# Altium PCB Sensor-PCB.PcbDoc
Units mm, origin at the board's own origin, x right, y up, seen from the top; angles counter-clockwise.
Board outline 100.25 x 60.25 mm, 2 copper layers (Top Layer, Bottom Layer); 59 components, 34 nets, 161 pads, 323 vias.
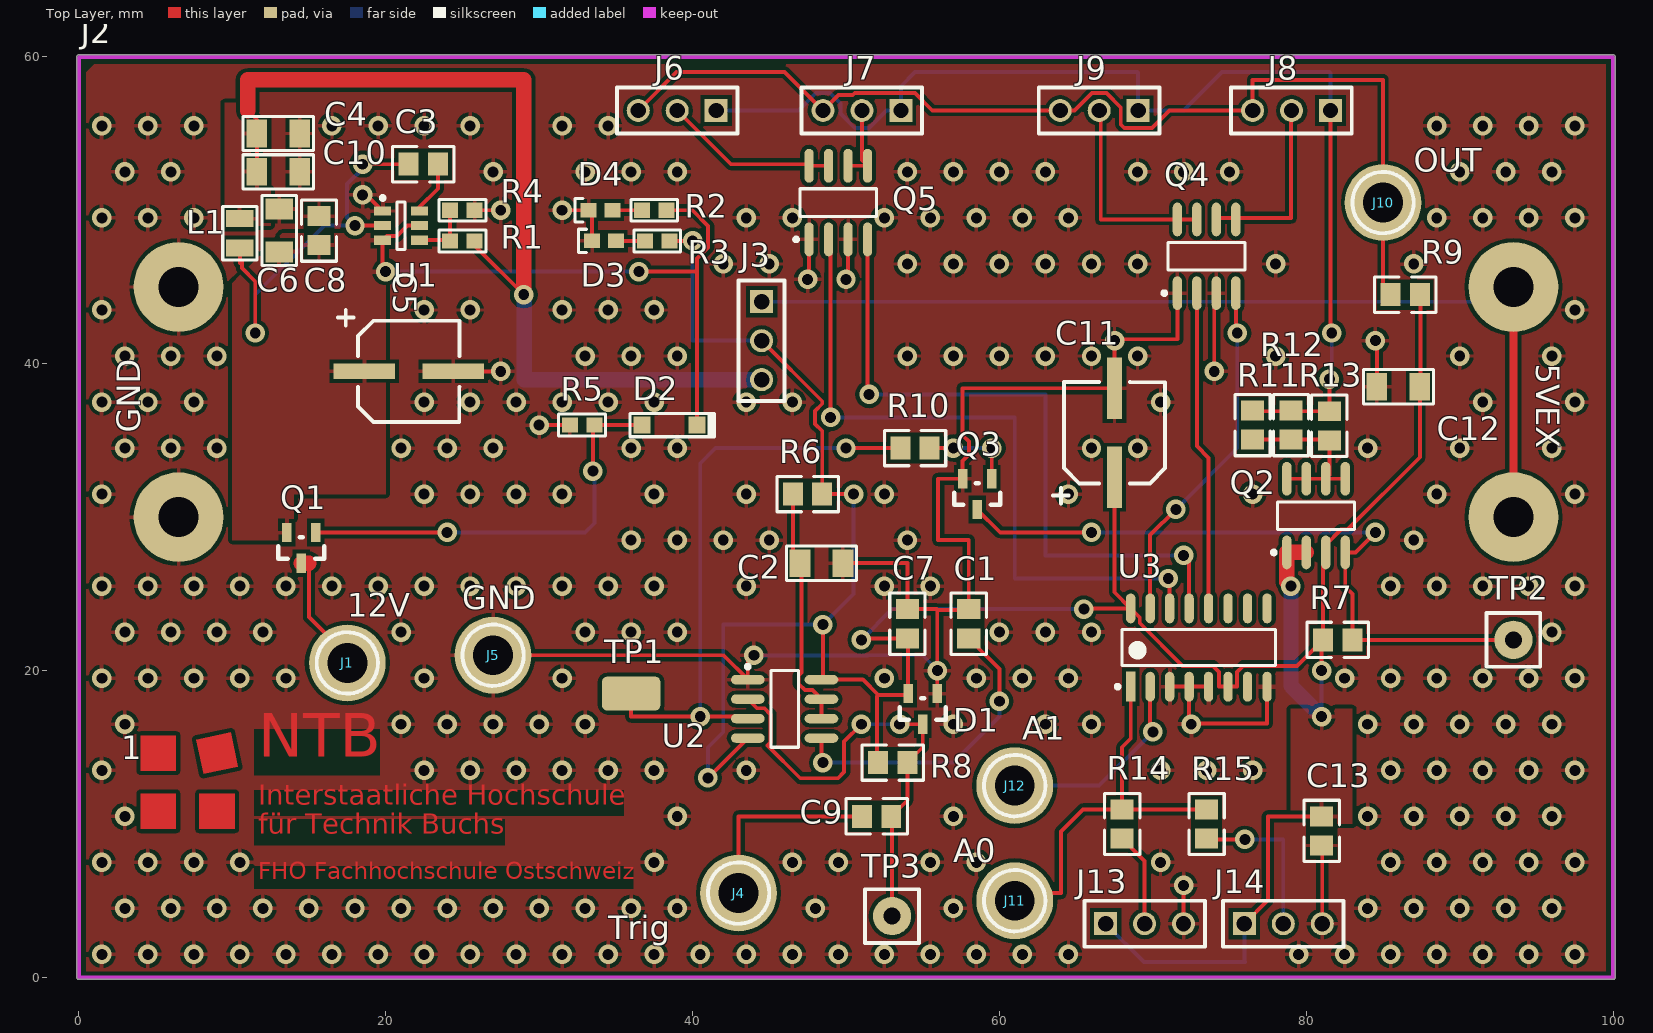
[diagram p0: Top Layer view]
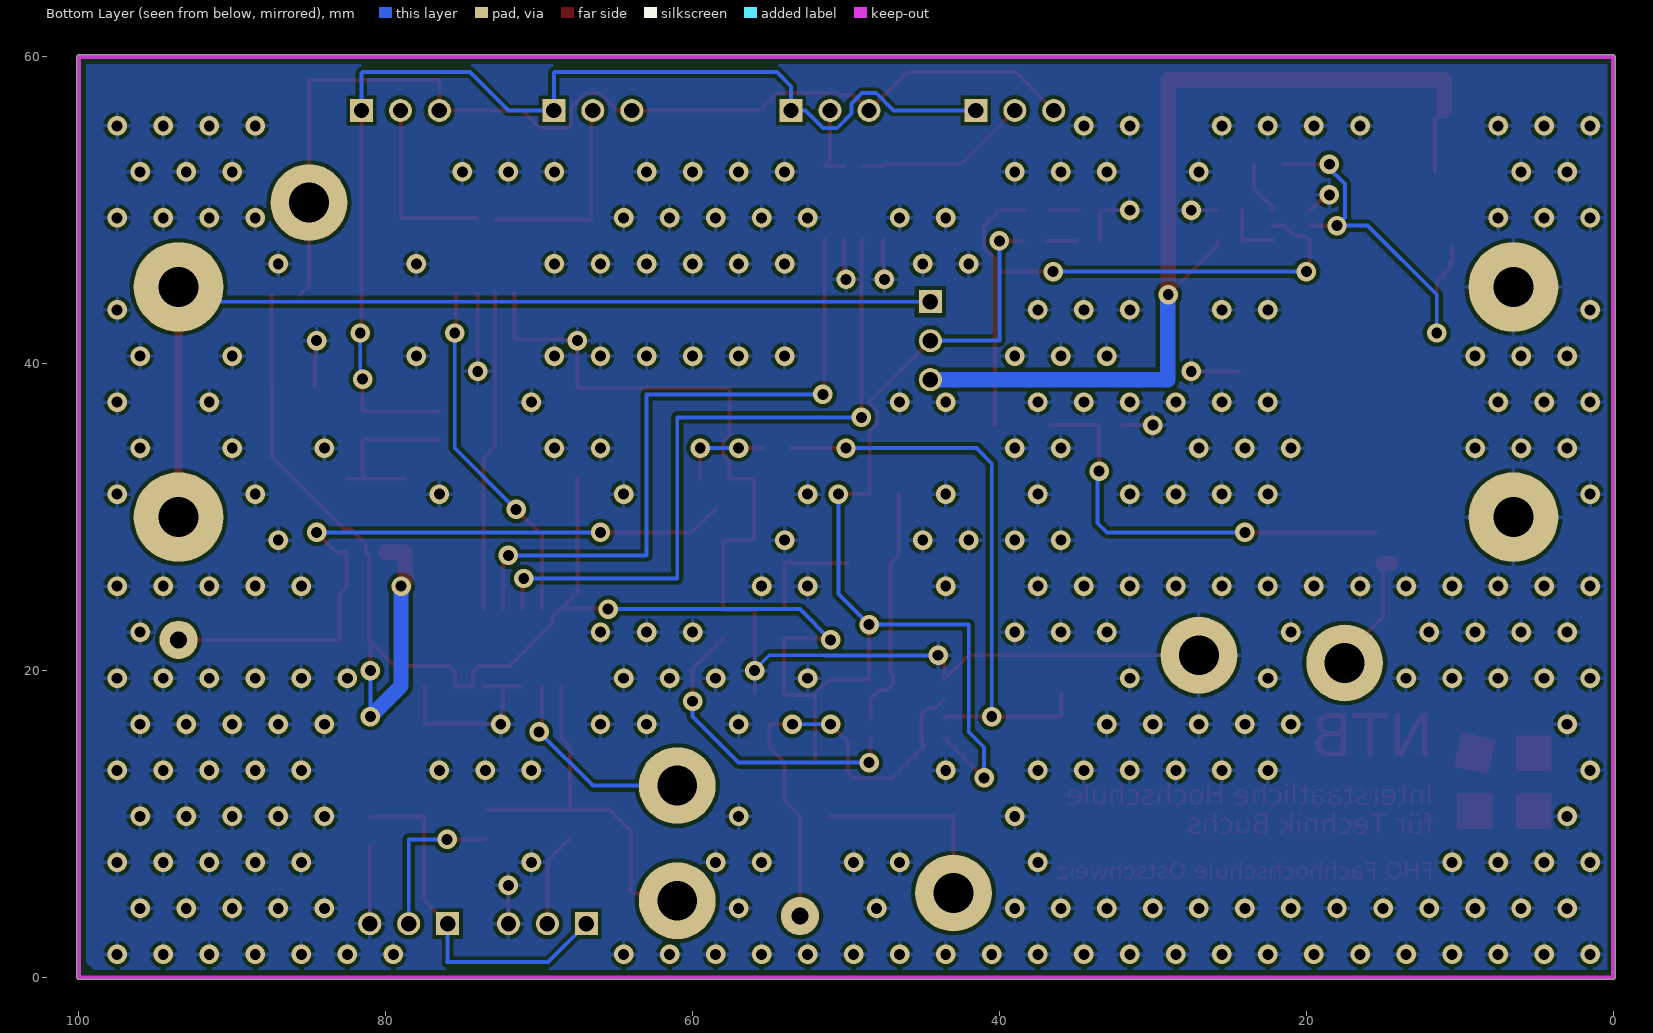
[diagram p1: Bottom Layer view, seen from below]
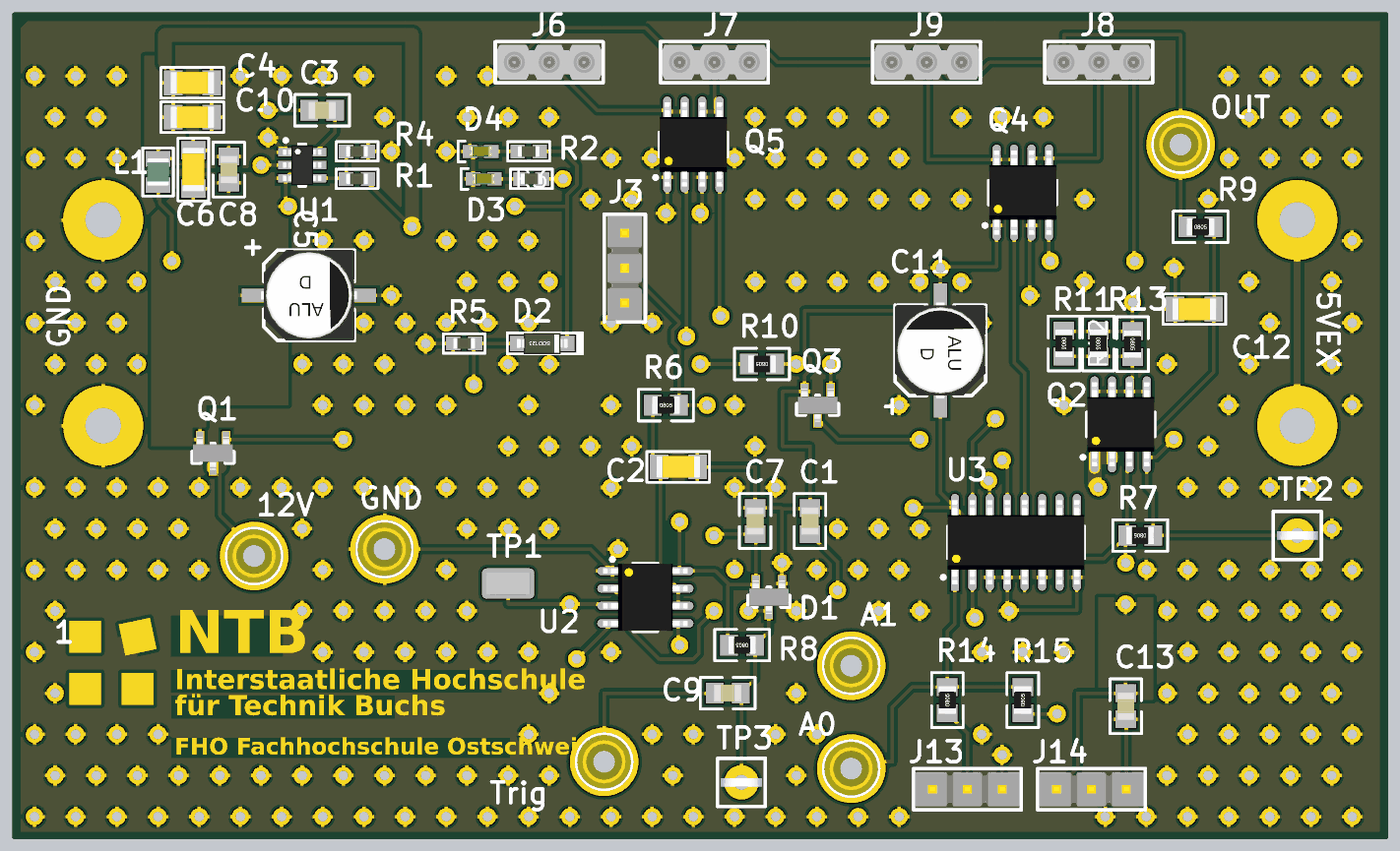
[diagram p2: 3D render of the assembled board from above, using the file's embedded part models]

## Layer stack, top to bottom
Top Solder: solder mask 0.0102, Solder Resist, Dk 3.5
Top Layer: signal copper 0.0356
Dielectric 1: dielectric 0.32, FR-4, Dk 4.8
Bottom Layer: signal copper 0.0356
Bottom Solder: solder mask 0.0102, Solder Resist, Dk 3.5

## Board outline
0,-0.127 cw(c0,0) -0.127,0 -0.127,60 cw(c0,60) 0,60.127 100,60.127 cw(c100,60) 100.127,60 100.127,0 cw(c100,0) 100,-0.127

## Design rules (kind name [scope] priority, off if disabled: settings)
Clearance [All] p1: gap=0.254 ignorepadtopadclearanceinfootprint=FALSE except(0: Arc-Hole Track-Hole SMDPad-Hole THPad-Hole Via-Hole Fill-Hole Poly-Hole Region-Hole Text-Hole)
ComponentClearance "Schematic Component Clearance Constraint" [InComponent('J2')] p1: gap=0 collisioncheckmode=3 verticalgap=0 showdistances=FALSE
ComponentClearance [All] p2: gap=0.254 collisioncheckmode=3 verticalgap=0.254 showdistances=FALSE
HoleSize [All] p1: absolutevalues=TRUE maxlimit=5 minlimit=0.4 maxpercent=80.000 minpercent=20.000
PolygonConnect [All] p1: connectstyle=Relief reliefconductorwidth=0.254 reliefentries=4 polygonreliefangle="90 Angle" airgapwidth=0.254
RoutingVias [All] p1: holewidth=0.711 width=1.27 viastyle="Through Hole" minholewidth=0.711 minwidth=1.27 maxholewidth=0.711 maxwidth=1.27
SilkToSilkClearance [All] p1: silktosilkclearance=0
SolderMaskExpansion [All] p1: expansion=0.102
Width [All] p1: maxlimit=1 minlimit=0.254 preferedwidth=0.254
27 further rules are at their usual default settings.

## Components (designator, comment, footprint, x,y, rotation, side; value= is the part's Value field where it differs from the comment)
1 "NTB Logo Medium" "NTB Logo Medium Copper" 4,6 r0 top
C1 "100nF" CAP-0805[2012] 58,23.05 r90 top
C2 "10uF" CAP-1206[3216] 48.4,27 r0 top
C3 "100nF" CAP-0805[2012] 22.45,53 r180 top
C4 "22uF" CAP-1206[3216] 13,55 r0 top
C5 "AVE476M16D16T-F" "CDE_CAP AVE CODE D_H" 21.5,39.5 r270 top value=47uF
C6 "10uF" CAP-1206[3216] 13.067,48.683 r90 top
C7 "100nF" CAP-0805[2012] 54,23.05 r90 top
C8 "100nF" CAP-0805[2012] 15.654,48.677 r90 top
C9 "1nF" CAP-0805[2012] 52,10.5 r0 top
C10 "22uF" CAP-1206[3216] 13,52.5 r0 top
C11 "AVE476M16D16T-F" "CDE_CAP AVE CODE D_H" 67.5,35.5 r0 top value=47uF
C12 "10uF" CAP-1206[3216] 86,38.5 r180 top
C13 "100nF" CAP-0805[2012] 81,9.55 r270 top
D1 "BAT721S" SOT-23 55,17.5 r0 top
D2 "BZT52C4V7" SOD-123 38.5,36 r180 top
D3 "LTST-C190GKT" "LED 0603 green" 34.225,48 r0 top
D4 "LTST-C190GKT" "LED 0603 green" 34,50 r0 top
J1 "12V" "Laborbuchse 2mm" 17.5,20.5 r0 top
J2 "ExpBoardSmall" EXPBOARDCON 93.5,30 r180 top locked
J3 "3 Pin Header" "3PIN HEADER 2.54MM" 44.5,44.02 r90 top
J4 "Trig" "Laborbuchse 2mm" 43,5.5 r0 top
J5 "GND" "Laborbuchse 2mm" 27,21 r0 top
J6 "3 Pin Header Buchse" "3PIN HEADER SOCKET 2.54MM" 41.52,56.5 r0 top
J7 "3 Pin Header Buchse" "3PIN HEADER SOCKET 2.54MM" 53.56,56.5 r0 top
J8 "3 Pin Header Buchse" "3PIN HEADER SOCKET 2.54MM" 81.56,56.5 r0 top
J9 "3 Pin Header Buchse" "3PIN HEADER SOCKET 2.54MM" 69.02,56.5 r0 top
J10 "OUT" "Laborbuchse 2mm" 85,50.5 r0 top
J11 "A0" "Laborbuchse 2mm" 61,5 r0 top
J12 "A1" "Laborbuchse 2mm" 61,12.5 r0 top
J13 "3 Pin Header" "3PIN HEADER 2.54MM" 66.94,3.5 r180 top
J14 "3 Pin Header" "3PIN HEADER 2.54MM" 75.98,3.5 r180 top
L1 "CKP2016 4R7M-T" IND-0806 10.5,48.5 r90 top
Q1 "STR1P2UH7" SOT-23 14.5,28 r0 top
Q2 "IRF7204PBF" SOIC-8 80.635,30.1 r90 top
Q3 "BC846B-7-F" SOT-23 58.55,31.5 r0 top
Q4 "IRF7311PBF" SOIC-8 73.5,47 r90 top
Q5 "IRF7311PBF" SOIC-8 49.5,50.5 r90 top
R1 "56k" RES-0603[1608] 25,48 r0 top value=10K
R2 "TBD" RES-0603[1608] 37.5,50 r0 top value=10K
R3 "TBD" RES-0603[1608] 37.7,48 r0 top value=10K
R4 "10k" RES-0603[1608] 25,50 r180 top value=10K
R5 "10K" RES-0603[1608] 32.8,36 r0 top
R6 "16k" RES-0805[2012] 47.5,31.5 r0 top
R7 "1k" RES-0805[2012] 82.05,22 r180 top value=16k
R8 "4k3" RES-0805[2012] 53.05,14 r180 top
R9 "510R" RES-0805[2012] 86.45,44.5 r0 top value=16k
R10 "10k" RES-0805[2012] 54.5,34.5 r180 top value=16k
R11 "33R" RES-0805[2012] 76.5,36 r270 top value=16k
R12 "33R" RES-0805[2012] 79,36 r270 top value=16k
R13 "33R" RES-0805[2012] 81.5,35.95 r270 top value=16k
R14 "10k" RES-0805[2012] 68,10 r90 top value=16k
R15 "10k" RES-0805[2012] 73.5,10 r90 top value=16k
TP1 "Testpoint SMD 1206" TP-SMD-1206 36,18.5 r0 top
TP2 "Testpunkt THT 1mm" TP-THT-1.1mm 93.5,22 r0 top
TP3 "Testpunkt THT 1mm" TP-THT-1.1mm 53,4 r0 top
U1 "TPS562209" SOT-23-6 21,49 r0 top
U2 "ICM7555" SOIC-8 46,17.5 r0 top
U3 "74HC237D,653" SOIC-16 73,21.5 r90 top

## Footprints (in the part's own frame and the unit in brackets; to place one, negate y for a bottom-side part, rotate by r counter-clockwise, add the part's x,y. Pads: shape width x height; smd on the part's side, far side on the other; paste and mask are expansions set on the pad)
"3PIN HEADER 2.54MM" [mm]
  rect 1.5x1.5 hole 1 paste-0.002 mask+0.07: 1(0.02,0)
  round 1.5 hole 1 paste-0.002 mask+0.07: 2(-2.52,0) 3(-5.06,0)
  silkscreen extent -6.46,-1.5 1.4,1.5, body extent -6.33,-1.24 1.29,1.24, height 8.38
"3PIN HEADER SOCKET 2.54MM" [mm]
  rect 1.5x1.5 hole 1 paste-0.002 mask+0.07: 1(0.02,0)
  round 1.5 hole 1 paste-0.002 mask+0.07: 2(-2.52,0) 3(-5.06,0)
  silkscreen extent -6.46,-1.5 1.4,1.5, body extent -6.33,-1.27 1.29,1.27, height 3.8
CAP-0805[2012] [mm]
  rect 1.3x1.5 smd: 1(-0.95,0) 2(0.95,0)
  silkscreen extent -2,-1.15 2,1.15, body extent -1,-0.62 1,0.63, height 0.6
CAP-1206[3216] [mm]
  rect 1.35x1.8 smd: 1(-1.4,0) 2(1.4,0)
  silkscreen extent -2.29,-1.12 2.29,1.12, body extent -1.6,-0.8 1.6,0.8, height 1.8
"CDE_CAP AVE CODE D_H" [mm]
  rect 1x4 smd paste-0.002 mask+0.07: 1(0,-2.9) 2(0,2.9)
  silkscreen extent -4,-4.6 3.29,3.3, body extent -3.31,-3.5 3.29,3.5
EXPBOARDCON [mm]
  round 5.842 hole 2.6: 1(0,0) 2(0,-15) 3(87,-15) 4(87,0)
  Keep-Out Layer lines w0.254: 93.5,30 -6.5,30 -6.5,-30 93.5,-30 93.5,30
IND-0806 [mm]
  rect 1.13x1.8 smd: 1(-0.965,0) 2(0.965,0)
  silkscreen extent -1.75,-1.12 1.75,1.12, body extent -1,-0.8 1,0.8, height 1
"Laborbuchse 2mm" [mm]
  round 5 hole 2.6: 1(0,0)
  silkscreen extent -2,-2 2,2, body extent -2.01,-2.01 2,2.01, height 0.5
"LED 0603 green" [mm]
  rect 1.05x0.95 smd: 1(-0.775,0) 2(0.775,0)
  silkscreen extent -1.65,-0.76 -1.14,0.76, body extent -0.81,-0.4 0.81,0.4, height 0.6
"NTB Logo Medium Copper" [mm]
  Top Layer region: 0.023,7.458 2.348,7.458 2.348,9.783 0.023,9.783
  Top Layer region: 0.023,3.658 2.348,3.658 2.348,5.983 0.023,5.983
  Top Layer region: 3.848,3.658 6.173,3.658 6.173,5.983 3.848,5.983
  Top Layer region: 4.115,7.242 6.389,7.725 5.905,9.999 3.632,9.516
RES-0603[1608] [mm]
  rect 1.05x1 smd: 1(-0.8,0) 2(0.8,0)
  silkscreen extent -1.52,-0.71 1.52,0.71, body extent -0.8,-0.4 0.8,0.4, height 0.5
RES-0805[2012] [mm]
  rect 1.3x1.5 smd: 1(-0.95,0) 2(0.95,0)
  silkscreen extent -2,-1.15 2,1.15, body extent -1,-0.62 1,0.63, height 0.6
SOD-123 [mm] "SOD-123, 2 leads, plastic surface-mounted package"
  rect 1.1x1.1 smd: 1(-1.8,0) 2(1.8,0)
  silkscreen extent -2.92,-0.76 2.57,0.76, body extent -1.85,-0.77 1.85,0.78, height 1.35
SOIC-8 [mm]
  oval 2.2x0.6 smd: 1(-2.4,1.905) 2(-2.4,0.635) 3(-2.4,-0.635) 4(-2.4,-1.905) 5(2.4,-1.905) 6(2.4,-0.635) 7(2.4,0.635) 8(2.4,1.905)
  silkscreen extent -2.52,-2.5 0.9,2.88, body extent -3.07,-2.44 3.07,2.45, height 1.76
SOIC-16 [mm]
  rect 1.95x0.6 smd: 1(-2.55,4.445)
  oval 1.95x0.6 smd: 2(-2.55,3.175) 3(-2.55,1.905) 4(-2.55,0.635) 5(-2.55,-0.635) 6(-2.55,-1.905) 7(-2.55,-3.175) 8(-2.55,-4.445) 9(2.55,-4.445) 10(2.55,-3.175) 11(2.55,-1.905) 12(2.55,-0.635) 13(2.55,0.635) 14(2.55,1.905) 15(2.55,3.175) 16(2.55,4.445)
  silkscreen extent -2.67,-5 1.18,5.42, body extent -3.07,-4.98 3.07,4.98, height 1.73
SOT-23 [mm]
  rect 0.61x1.26 smd paste-0.05: 1(0.95,1) 2(-0.95,1) 3(0,-1)
  silkscreen extent -1.5,-0.7 1.5,0.7, body extent -1.45,-1.21 1.45,1.21, height 0.98
SOT-23-6 [mm]
  rect 1.1x0.6 smd: 1(-1.2,0.95) 2(-1.2,0) 3(-1.2,-0.95) 4(1.2,-0.95) 5(1.2,0) 6(1.2,0.95)
  silkscreen extent -1.32,-1.55 0.25,1.92, body extent -1.4,-1.45 1.4,1.45, height 1.45
TP-SMD-1206 [mm]
  rrect30% 3.8x2.2 smd: 1(0,0)
  body extent -1.6,-0.81 1.6,0.81, height 2.22
TP-THT-1.1mm [mm]
  round 2.5 hole 1.1: 1(0,0)
  silkscreen extent -1.75,-1.75 1.75,1.75, body extent -1.5,-0.32 1.5,0.32, height 8.3

## Part data
1: library part "NTB Logo Medium Copper"
C1 C3 C7 C8 C13: library part "MLCC 0805 100n 50V", "100n 50V X7R MLCC 0805 (1608 Metric)", Case-EIA=0803, Case-Metric=2013, Rated Voltage=50V, Temperature Characteristics EIA=X7R, Temperature Range EIA=-55C/+125C, Tolerance=10%, ValAddon="50V, 10%"
C2 C6 C12: library part "MLCC 1206 10u 16V", "10u 16V X7R MLCC 1206 (3016 Metric)", Case-EIA=1206, Case-Metric=3216, Rated Voltage=10V, Temperature Characteristics EIA=X7R, Temperature Range EIA=-55C/+125C, Tolerance=10%, ValAddon="16V, 10%"
C4 C10: library part "MLCC 1206 22u 10V", "22u 10V X7R MLCC 1206 (3016 Metric)", Case-EIA=1206, Case-Metric=3216, Rated Voltage=10V, Temperature Characteristics EIA=X7R, Temperature Range EIA=-55C/+125C, Tolerance=10%, ValAddon="10V, 10%"
C5 C11: library part "ELKO 47uF 16V", "ELKO, 47uF, 16V, CDE_AVE476M16D16T-F_AVE CODE D", Distributor PartNr=598-AVE476M16D16T-F, Manufacturer="Cornell Dubilier", ValueAddon="16V ±20 %", #Class=PASSIVE, #ClassSub=CAPACITOR, ComponentLink1Description="Manufacturer Link", ComponentLink2Description=Datasheet, ComponentLink2URL=http://www.cde.com/catalogs/AVE.pdf, ComponentLink3Description="Packaging Specification", Distributor=Mouser, Manufacturer PartNr=AVE476M16D16T-F, Published=20121220, Publisher="Stefan Ursella, M.Eng", RefFootprint="CDE_CAP AVE CODE D", RefSchema="CDE_AVE476M16D16T-F_AVE CODE D"
C9: library part "MLCC 0805 1n 16V", "MLCC - SMD/SMT 0805 1000pF 16V C0G 10%", Manufacturer=Vishay, Manufacturer PartNr=VJ0805A102KXJPW1BC, Supplier Part Number 1=77-VJ0805A102KXJPBC, ValueAddon="16V, 10%", ComponentLink1Description="Manufacturer Link", ComponentLink1URL=http://www.vishay.com/product?docid=28548, ComponentLink2Description=Datasheet, ComponentLink2URL=http://www.vishay.com/docs/28548/vjw1bcbascomseries.pdf, Published=18.12.14, Publisher=SCLM, RefFootprint=Gen_0805_H, RefSchema=Cap_1nF, Status=Lager?, Supplier 1=Mouser
D1: library part BAT721S-SOT23, "NXP  BAT721S  SCHOTTKY-DIODE, 2FACH", Distributor PartNr=1081200, Manufacturer=NXP, ComponentLink1Description="Manufacturer Link", ComponentLink1URL=http://www.nxp.com/search?q=%09bat721s&type=keyword&rows=10, ComponentLink2Description=Datasheet, ComponentLink2URL=http://www.farnell.com/datasheets/453891.pdf, ComponentLink3Description="Packaging Specification", Distributor=Farnell, Manufacturer PartNr=BAT721S, Published=20150612, Publisher=SCNP, RefFootprint="CDE_CAP AVE CODE D", RefSchema="CDE_AVE476M16D16T-F_AVE CODE D"
D2: "4.7V Zener-Diode, BZT52C4V7", Forward Current="1.5 A", Forward Voltage=1.25V, Reverse Voltage=600V, ComponentLink1Description="Datasheet RF2L6S", ComponentLink1URL=V:\Diodes\RHOM_RF2L6S.pdf
D3 D4: library part "LED Green", "LED SMD 0603 green 6mcd", Color=green, Forward Current=30mA, Forward Voltage=2.1V, ComponentLink1Description="Datasheet LTST-C190GKT", ComponentLink1URL=V:\Diodes\Lite-On-LTST-C190GKT.pdf, Spectrum=565nm
J1 J4 J5 J10 J11 J12: library part Laborbuchse, "Laborbuchse", #Class=Connector, #ClassSub=Laborbuchse, Published=2008-12-16, Publisher="B.Sc. Ursella", RefFootprint="Laborbuchse 2mm", RefSchema=Laborbuchse, Size=2mm, Status=nLager
J3 J13 J14: "3 Pin Header 2.54mm", ComponentLink1Description="Manufacturer Link", ComponentLink2Description=Datasheet, Published=16.12.2014, Publisher=SCLM, RefFootprint=GEN_Buchsenleiste-2.54MM_3, RefSchema=Gen_Buchsenleiste_3-Pin, Status=Lager?
J6 J7 J8 J9: "3 Pin Header 2.54mm Buchse", ComponentLink1Description="Manufacturer Link"
L1: library part "L 4.7u", "MULTILAYER CHIP POWER INDUCTORS", Current Rating=900mA, Inductance=4u7, Manufactor="Taiyo Yuden", ComponentLink1Description="Datasheet Taiyo Yuden CK Series", ComponentLink1URL=V:\Inductor\Taiyo_Yuden_CK_Series.pdf, DCR=160mOhm
Q1: "Low Power P-Kanal Mosfet", Manufacturer="ST Microelectronics", ComponentLink1Description="Manufacturer Link", ComponentLink2Description=Datasheet, Rdson=100mOhm, Vde=30
Q2: library part IRF7204, "High Power P-Kanal Mosfet", Manufacturer="International Rectifiers", Supplier Part Number 1=9103350, ComponentLink1Description="Manufacturer Link", ComponentLink1URL=http://www.irf.com/, ComponentLink2Description=Datasheet, ComponentLink2URL=http://www.irf.com/product-info/datasheets/data/irf7204.pdf, Manufacturer PartNr=IRF7204PBF, Published=8-Jun-2000, Publisher="Altium Limited", RefFootprint=IRF_SO8_H, RefSchema=IRF_IRF7204_SO-8, Status=nLager, Supplier 1=Farnell
Q3: library part BC846B-SOT23, "NPN General-purpose Transistor", Distributor PartNr=1773617, Manufacturer="DIODES INC", #Class=SEMICONDUCTOR-TRANSISTOR, #ClassSub=BJT-NPN, ComponentLink1Description="Manufacturer Link", ComponentLink1URL=http://www.diodes.com/products/catalog/detail.php?item-id=6689&popup=datasheet, ComponentLink2Description=Datasheet, ComponentLink2URL=http://www.diodes.com/datasheets/ds11108.pdf, ComponentLink3Description="Packaging Specification", ComponentLink3URL=http://www.diodes.com/datasheets/ap02001.pdf, Distributor=Farnell, Manufacturer PartNr=BC846B-7-F, Published=17-Sep-2003, Publisher="Altium Limited", RefFootprint=DIODS_SOT23_1B2E3C_3_H, RefSchema=DIODS_BC846B-7-F_SOT23, Status=nLager
Q4 Q5: library part IRF7311, "Dual N-Kanal Mosfet", Manufacturer="International Rectifier", Supplier Part Number 1=1013364, ComponentLink1Description="Manufacturer Link", ComponentLink1URL=http://www.irf.com/, ComponentLink2Description=Datasheet, ComponentLink2URL=http://www.irf.com/product-info/datasheets/data/irf7311.pdf, Manufacturer PartNr=IRF7311PBF, Published=8-Jun-2000, Publisher="Altium Limited", RefFootprint=IRF_SO8_H, RefSchema=IRF_IRF7311_SO-8, Status=nLager, Supplier 1=Farnell
R1 R2 R3 R4 R5: library part "RES 0603", "0603 (1608 Metric) 1/10 W 10K 1 Thick Film Chip Resistor", Case-EIA=0603, Case-Metric=1608, Power="1/10 W", Temp. Coefficent=±100ppm, Tolerance=1%, Technology=SMT
R6 R7 R8 R9 R10 R11 R12 R13 R14 R15: library part "RES 0805", "0805 (2013 Metric) 1/10 W 10K 1 Thick Film Chip Resistor", Case-EIA=0805, Case-Metric=2013, Power="1/10 W", Temp. Coefficent=±100ppm, Tolerance=1%, Technology=SMT
TP1: "Testpoint xSmall", Type="Standard (No BOM)"
TP2 TP3: Manufacturer="Keystone Electronics", Supplier Part Number 1=534-1035, #Class=Connector, #ClassSub=Laborbuchse, FootprintRef=GEN_TP-THT-1.1mm_1_H, Published=2008-12-16, Publisher="B.Sc. Ursella", RefFootprint=GEN_TP-THT-1.1mm_1_H, RefSchema="Testpunkt 1mm", Status=nLager, Supplier 1=Mouser
U1: library part TPS562209-SOT23-6, "3-A Synchronous Step-Down Voltage Regulator", Manufactor="Texas Instruments", ComponentLink1Description="Datasheet TPS56x209", ComponentLink1URL=V:\Power_Management_ICs\PWM_Cont\TPS56x209.pdf, Order Nr.=TPS562209DDCR
U2: library part ICM7555-SOIC8, "General purpose CMOS timer", Manufacturer="National Semiconductor", Supplier Part Number 1=771-ICM7555, #Class=Analog, #SubClass="Timer Circuit", ComponentLink1Description=Datasheet, ComponentLink1URL=http://www.datasheetcatalog.org/datasheet/intersil/fn2867.pdf, ComponentLink2Description=Distributor, ComponentLink2URL=https://www.distrelec.ch/ishopWebFront/catalog/product.do/para/node/is/acaaabaaacaf/and/highlightNode/is/640145/and/id/is/01/and/series/is/1.html, Manufacturer PartNr=ICM7555, Published=15/04/2002, Publisher="Altium Hobart Technology Centre", RefFootprint=NXP_SO8(SOT96-1)_H, RefSchema=NXP_ICM7555_SO-8, Status=nLager, Supplier 1="Mouser Electronics"
U3: library part 74HC237D-SOIC16, "3-to-8 line decoder, demultiplexer, NXP, SO16", Manufacturer=NXP, Supplier Part Number 1=771-HC237D653, ComponentLink1Description="Manufacturer Link", ComponentLink1URL=http://www.nxp.com/products/logic/decoders_demultiplexers/74HC237D.html, ComponentLink2Description=Datasheet, ComponentLink2URL=http://www.nxp.com/documents/data_sheet/74HC237.pdf, Manufacturer PartNr=74HC237D,653, Published=28.11.2014, Publisher=SCLM, RefFootprint=NXP_SO16(SOT109-1)_H, RefSchema=NXP_74HC237D_SO-16, Status=nLager, Supplier 1="Mouser Electronics"

## Via types
v1: diameter 1.27, hole 0.711, Top Layer to Bottom Layer, 323 vias

## Nets (pads, with @x,y where several pads share a name; then routed paths per layer and width w, separated by ;. In a path a pad name is that pad's centre, name@x,y a point inside that pad or via, vN(x,y) a via of type N, cw(c..) or ccw(c..) an arc to the next point about the centre after c; other vN are vias at no path point)
5V: C7.1 C11.1 C12.1 C13.1 D1.2 J3.2 J13.1 J14.1 Q2.1 Q2.2 Q2.3 R3.2 R6.2 R7.2 R8.2 R9.2 U2.4 U2.8 U3.6 U3.16 | length 189
  Top Layer w0.254: R3.2 v1(40,48) ; v1(41,13) 41.005,13 U2.4 ; J3.2 48.45,37.55 48.45,37.387 47.984,36.921 47.984,36.079 48.45,35.613 R6.2 v1(50.5,31.5) ; v1(48.5,23) 48.5,19.505 U2.8 51.095,19.405 52.1,18.4 ; v1(51,22) 51.1,22.1 C7.1 54.05,22.05 D1.2 53.95,18.4 52.1,18.4 ; R8.2 52.016,14.084 52.016,18.316 52.1,18.4 ; v1(65.5,24) 65.55,24.05 U3.16 ; C11.1 67.5,25.105 U3.16 ; J14.1 77.5,5.04 77.5,10.5 C13.1 ; v1(81,20) R7.2@81,21.9 ; R9.2@87.45,44.5 87.45,38.55 C12.1 87.4,33.9 82.681,29.181 82.258,29.181 81.27,28.193 Q2.3 81.1,27.53 R7.2 R7.2@81,21.9 ; U3.16 69.144,23.461 69.144,23.093 71.931,20.306 73.917,20.306 74.316,19.907 74.316,18.95 U3.6 75.494,18.95 75.494,19.907 75.893,20.306 79.406,20.306 R7.2@81,21.9
  Top Layer w1: v1(79,25.5) 78.73,25.77 Q2.1 Q2.2
  Bottom Layer w0.254: v1(40,48) 40,41.5 J3.2 ; v1(41,13) 41,15 42,16 42,23 v1(48.5,23) 50.5,25 v1(50.5,31.5) ; v1(51,22) 53,24 v1(65.5,24) ; J13.1 69.42,1 76,1 75.96,1.04 J14.1 ; v1(81,17) v1(81,20)
  Bottom Layer w1: v1(79,25.5) 79,19 v1(81,17)
5VEX: J2.1 J2.2 J3.1 | length 64.4
  Top Layer w0.508: J2.1@93.5,29 J2.1 J2.2@93.5,44
  Bottom Layer w0.254: J3.1 92.54,44.04 J2.2
12V: C5.1 C6.1 C8.1 D2.1 Q1.2 R2.2 U1.3 U1.5 | length 41.6
  Top Layer w0.254: v1(20,46) 19.8,46.2 U1.3 20.069,48.319 20.731,48.319 21.412,49 U1.5 ; v1(36.5,46) 40.3,46 ; R2.2 40,50 41.016,48.984 41.016,47.579 40.3,46.863 40.3,46 ; D2.1 40.3,46
  Bottom Layer w0.254: v1(20,46) v1(36.5,46)
GND: C1.2 C2.2 C4.2 C5.2 C6.2 C7.2 C8.2 C10.2 C11.2 C12.2 C13.2 D1.1 D3.1 D4.1 J2.3 J2.4 J5.1 J13.3 J14.3 Q3.2 Q4.1 Q4.3 Q5.1 Q5.3 R4.1 R5.1 U1.1 U2.1 U3.3 U3.4 U3.5 U3.8 | length 132.5
  Top Layer w0.254: v1(18.5,51) 18.75,51 U1.1 ; C5.2 v1(27.5,39.5) ; R4.1 v1(27.5,50) ; J5.1 42.005,21 U2.1 43.6,20.6 v1(44,21) ; v1(30,36) R5.1 ; v1(31.5,50) D4.1 33.45,49.775 D3.1 ; v1(47.5,45.5) 47.595,45.595 Q5.1 ; C2.2@49.9,27 54,27 C7.2 55.9,24 55.95,23.95 ; v1(50,45.5) 50.135,45.635 Q5.3 ; D1.1 v1(55.95,20) 55.95,23.95 ; U3.3 U3.4 ; Q4.1 71.595,41.595 67.595,41.595 v1(67.5,41.5) C11.2 57.6,38.4 57.6,35.337 58.016,34.921 58.016,34.079 57.6,33.663 Q3.2 56,32.5 56,28.5 58,28.5 C1.2 57.95,23.95 55.95,23.95 ; J13.3 v1(72,6) ; U3.5 U3.4 ; v1(74,39.5) 74,44.465 Q4.3 ; U3.8@77.495,18.9 U3.8 77.445,16.555 72.555,16.555 v1(72.5,16.5) 72.365,16.635 U3.4 ; J14.3@81,3.46 J14.3 81.04,8.56 C13.2 ; v1(84.5,41.5) 84.6,41.4 C12.2
  Bottom Layer w0.254: v1(44,21) 44.016,20.984 51.421,20.984 51.437,21 55,21 55.95,20.05 v1(55.95,20)
  other v1: 1.5,1.5 4.5,1.5 7.5,1.5 10.5,1.5 13.5,1.5 16.5,1.5 19.5,1.5 22.5,1.5 25.5,1.5 28.5,1.5 31.5,1.5 34.5,1.5 37.5,1.5 40.5,1.5 43.5,1.5 46.5,1.5 49.5,1.5 52.5,1.5 55.5,1.5 58.5,1.5 61.5,1.5 64.5,1.5 79.5,1.5 82.5,1.5 85.5,1.5 88.5,1.5 91.5,1.5 94.5,1.5 97.5,1.5 3,4.5 6,4.5 9,4.5 12,4.5 15,4.5 18,4.5 21,4.5 24,4.5 27,4.5 30,4.5 33,4.5 36,4.5 39,4.5 48,4.5 57,4.5 84,4.5 87,4.5 90,4.5 93,4.5 96,4.5 1.5,7.5 4.5,7.5 7.5,7.5 10.5,7.5 37.5,7.5 46.5,7.5 49.5,7.5 55.5,7.5 58.5,7.5 70.5,7.5 85.5,7.5 88.5,7.5 91.5,7.5 94.5,7.5 97.5,7.5 3,10.5 39,10.5 57,10.5 84,10.5 87,10.5 90,10.5 93,10.5 96,10.5 1.5,13.5 22.5,13.5 25.5,13.5 28.5,13.5 31.5,13.5 34.5,13.5 37.5,13.5 43.5,13.5 70.5,13.5 73.5,13.5 76.5,13.5 85.5,13.5 88.5,13.5 91.5,13.5 94.5,13.5 97.5,13.5 3,16.5 21,16.5 24,16.5 27,16.5 30,16.5 33,16.5 57,16.5 63,16.5 66,16.5 84,16.5 87,16.5 90,16.5 93,16.5 96,16.5 1.5,19.5 4.5,19.5 7.5,19.5 10.5,19.5 13.5,19.5 22.5,19.5 31.5,19.5 52.5,19.5 58.5,19.5 61.5,19.5 64.5,19.5 82.5,19.5 85.5,19.5 88.5,19.5 91.5,19.5 94.5,19.5 97.5,19.5 3,22.5 6,22.5 9,22.5 12,22.5 21,22.5 33,22.5 36,22.5 39,22.5 60,22.5 63,22.5 66,22.5 96,22.5 1.5,25.5 4.5,25.5 7.5,25.5 10.5,25.5 13.5,25.5 16.5,25.5 19.5,25.5 22.5,25.5 25.5,25.5 28.5,25.5 31.5,25.5 34.5,25.5 37.5,25.5 43.5,25.5 52.5,25.5 55.5,25.5 85.5,25.5 88.5,25.5 91.5,25.5 94.5,25.5 97.5,25.5 36,28.5 39,28.5 42,28.5 45,28.5 54,28.5 87,28.5 1.5,31.5 22.5,31.5 25.5,31.5 28.5,31.5 31.5,31.5 37.5,31.5 43.5,31.5 52.5,31.5 64.5,31.5 76.5,31.5 88.5,31.5 97.5,31.5 3,34.5 6,34.5 9,34.5 21,34.5 24,34.5 27,34.5 36,34.5 39,34.5 66,34.5 69,34.5 84,34.5 90,34.5 96,34.5 1.5,37.5 4.5,37.5 7.5,37.5 22.5,37.5 25.5,37.5 28.5,37.5 31.5,37.5 34.5,37.5 37.5,37.5 43.5,37.5 46.5,37.5 70.5,37.5 91.5,37.5 97.5,37.5 3,40.5 6,40.5 9,40.5 33,40.5 36,40.5 39,40.5 54,40.5 57,40.5 60,40.5 63,40.5 66,40.5 69,40.5 78,40.5 90,40.5 96,40.5 1.5,43.5 22.5,43.5 25.5,43.5 31.5,43.5 34.5,43.5 37.5,43.5 97.5,43.5 42,46.5 45,46.5 54,46.5 57,46.5 60,46.5 63,46.5 66,46.5 69,46.5 78,46.5 87,46.5 1.5,49.5 4.5,49.5 7.5,49.5 43.5,49.5 46.5,49.5 52.5,49.5 55.5,49.5 58.5,49.5 61.5,49.5 64.5,49.5 88.5,49.5 91.5,49.5 94.5,49.5 97.5,49.5 3,52.5 6,52.5 27,52.5 33,52.5 36,52.5 39,52.5 54,52.5 57,52.5 60,52.5 63,52.5 69,52.5 72,52.5 75,52.5 90,52.5 93,52.5 96,52.5 1.5,55.5 4.5,55.5 7.5,55.5 16.5,55.5 19.5,55.5 22.5,55.5 25.5,55.5 31.5,55.5 34.5,55.5 88.5,55.5 91.5,55.5 94.5,55.5 97.5,55.5
NetC1_1: C1.1 U2.5 | length 20.3
  Top Layer w0.254: U2.5 48.4,14.1 v1(48.5,14) ; C1.1 60,20.1 v1(60,18)
  Bottom Layer w0.254: v1(48.5,14) 57,14 60,17 v1(60,18)
NetC2_1: C2.1 R6.1 U2.6 U2.7 | length 15.8
  Top Layer w0.254: R6.1 46.55,27.55 47.1,27 47.1,19.868 46.919,19.687 46.919,19.123 47.318,18.724 47.811,18.724 U2.7 U2.6
NetC3_1: C3.1 U1.6 | length 3.5
  Top Layer w0.254: U1.6 22.2,50.2 23.4,51.4 C3.1
NetC3_2: C3.2 L1.1 U1.2 | length 26.6
  Top Layer w0.254: L1.1@10.5,47.5 10.5,46.57 10.634,46.704 10.634,46.232 11.5,45.366 v1(11.5,42) ; v1(18,49) U1.2 ; v1(18.5,53) C3.2
  Bottom Layer w0.254: v1(11.5,42) 11.5,44.5 16,49 v1(18,49) 17.484,49.516 17.484,51.706 18.639,52.861 v1(18.5,53)
NetC4_1: C4.1 C10.1 J3.3 L1.2 R1.2 | length 64.1
  Top Layer w0.254: 11,56.5 11.6,55.9 C4.1 C10.1 ; R1.2 25.8,47.7 v1(29,44.5)
  Top Layer w1: 11,56.483 11,56.5 11,58.5 29,58.5 v1(29,44.5)
  Bottom Layer w0.254: v1(29,44.5) v1@29.04,44.46
  Bottom Layer w1: v1@29.04,44.46 29.04,38.96 J3.3
NetC9_1: C9.1 J4.1 | length 13.1
  Top Layer w0.254: J4.1 43,10.5 C9.1
NetC9_2: C9.2 D1.3 R8.1 TP3.1 U2.2 | length 31
  Top Layer w0.254: U2.2 44.189,17.546 44.682,17.546 45.081,17.147 45.081,15.313 44.884,15.116 47.016,12.984 49.484,12.984 49.881,13.381 49.881,15.381 v1(51,16.5) ; TP3.1 53,10.45 C9.2 54,11.55 R8.1 55,15 D1.3 v1(53.5,16.5)
  Bottom Layer w0.254: v1(51,16.5) v1(53.5,16.5)
NetD2_2: D2.2 Q1.1 R5.2 | length 28
  Top Layer w0.254: Q1.1@15.5,29 Q1.1 v1(24,29) ; v1(33.5,33) 33.5,35.9 R5.2 D2.2
  Bottom Layer w0.254: v1(24,29) 33,29 33.6,29.6 33.6,32.9 v1(33.5,33)
NetD3_2: D3.2 R3.1 | length 1.9
  Top Layer w0.254: D3.2 R3.1
NetD4_2: D4.2 R2.1 | length 1.9
  Top Layer w0.254: D4.2 R2.1
NetJ1_1: J1.1 Q1.3 | length 8.2
  Top Layer w0.254: 15,27 15,23.5 J1.1@18,20.5
  Top Layer w1: Q1.3 15,27
NetJ6_1: J6.1 J7.1 J8.1 J9.1 R11.1 R12.1 R13.1 | length 74.9
  Top Layer w0.254: R11.1 76.55,36.9 R13.1 v1(81.5,39) ; J8.1 81.58,42.08 v1(81.66,42)
  Bottom Layer w0.254: J6.1 46.901,56.5 48.032,57.631 48.968,57.631 49.631,56.968 49.631,56.31 50.572,55.369 51.508,55.369 52.639,56.5 J7.1 53.58,58.08 54.5,59 69,59 69.04,58.96 J9.1 72,56.5 74.5,59 81.5,59 81.58,58.92 J8.1 ; v1(81.5,39) 81.66,39.16 v1(81.66,42)
NetJ6_2: J6.2 Q5.7 Q5.8 | length 11.4
  Top Layer w0.254: J6.2 42.5,53 47.495,53 Q5.8 Q5.7
NetJ6_3: J6.3 J7.3 J8.3 J9.3 J10.1 R9.1 | length 70.3
  Top Layer w0.254: J6.3 38.96,59 46,59 J7.3 49.5,57.5 50.441,57.5 50.572,57.631 54.488,57.631 55.619,56.5 J9.3 64.901,56.5 66.032,57.631 66.968,57.631 67.909,56.69 67.909,55.592 68.132,55.369 69.948,55.369 71.079,56.5 J8.3 76.5,58.5 85,58.5 J10.1 85,45.05 R9.1@85.55,44.5
NetJ7_2: J7.2 Q5.5 Q5.6 | length 5
  Top Layer w0.254: Q5.6 Q5.5 51.04,53.265 J7.2
NetJ8_2: J8.2 Q4.5 Q4.6 | length 12.1
  Top Layer w0.254: Q4.6 74.035,49.5 79,49.5 79,56.46 J8.2
NetJ9_2: J9.2 Q4.7 Q4.8 | length 13.4
  Top Layer w0.254: J9.2 66.6,56.4 66.6,49.4 Q4.8 Q4.7
NetJ11_1: J11.1 R14.2 R15.2 U3.1 | length 26.3
  Top Layer w0.254: J11.1@60,5.5 64,5.5 64,9.5 65.45,10.95 R14.2 ; U3.1 68.555,15.555 68,15 R14.2 ; R15.2 R14.2
NetJ12_1: J12.1 U3.2 | length 13.5
  Top Layer w0.254: U3.2 69.825,16.175 v1(70,16)
  Bottom Layer w0.254: J12.1 66.5,12.5 v1(70,16)
NetJ13_2: J13.2 R14.1 | length 6.2
  Top Layer w0.254: R14.1 69.46,7.59 J13.2
NetJ14_2: J14.2 R15.1 | length 10.5
  Top Layer w0.254: R15.1 73.55,9 v1(76,9)
  Bottom Layer w0.254: v1(76,9) 78.5,9 J14.2
NetQ2_4: Q2.4 Q3.3 R7.1 TP2.1 | length 45.5
  Top Layer w0.254: Q3.3 60.05,29 v1(66,29) ; v1(84.5,29) 83.2,27.7 Q2.4 82.54,25.46 83,25 R7.1 TP2.1
  Bottom Layer w0.254: v1(66,29) v1(84.5,29)
NetQ2_5: Q2.5 Q2.6 Q2.7 Q2.8 R11.2 R12.2 R13.2 | length 11.4
  Top Layer w0.254: R11.2 R12.2 81.45,35.05 R13.2 81.5,32.73 Q2.6 ; Q2.8 Q2.7 Q2.6 ; Q2.5 Q2.6
NetQ3_1: Q3.1 R10.1 | length 6.1
  Top Layer w0.254: R10.1 v1(57,34.5) ; Q3.1 v1(59.5,34.5)
  Bottom Layer w0.254: v1(57,34.5) v1(59.5,34.5)
NetQ4_2: Q4.2 U3.12 | length 20.9
  Top Layer w0.254: Q4.2 72.865,34.635 73.635,33.865 U3.12
NetQ4_4: Q4.4 U3.15 | length 22.9
  Top Layer w0.254: U3.15 69.825,28.825 v1(71.5,30.5) ; Q4.4 75.405,42.095 v1(75.5,42)
  Bottom Layer w0.254: v1(71.5,30.5) 75.5,34.5 v1(75.5,42)
NetQ5_2: Q5.2 U3.14 | length 46.2
  Top Layer w0.254: Q5.2 49,47.965 49,45.937 48.984,45.921 48.984,36.516 v1(49,36.5) ; v1(71,26) 71.095,25.905 U3.14
  Bottom Layer w0.254: v1(49,36.5) 61,36.5 61,26 v1(71,26)
NetQ5_4: Q5.4 U3.13 | length 44.7
  Top Layer w0.254: Q5.4 51.405,38.095 v1(51.5,38) ; v1(72,27.5) 72.365,27.135 U3.13
  Bottom Layer w0.254: v1(51.5,38) 63,38 63,27.5 v1(72,27.5)
NetR1_1: R1.1 R4.2 U1.4 | length 4
  Top Layer w0.254: U1.4 24.15,48.05 R1.1 R4.2
NetR10_2: R10.2 TP1.1 U2.3 | length 39.1
  Top Layer w0.254: TP1.1 36,17 v1(40.5,17) 43.465,17 U2.3 ; v1(50,34.5) R10.2
  Bottom Layer w0.254: v1(40.5,17) 40.5,33.5 41.5,34.5 v1(50,34.5)
pads on no net: U3.7 U3.9 U3.10 U3.11

## Polygon pours and split planes (outlines as drawn)
NetC4_1 on Top Layer "Top Layer-No Net" (solid, pour order 6): 9.5,57 12.5,57 12.5,49 9.5,49
5V on Top Layer "Top Layer-No Net" (solid, pour order 8): 79,17.5 83,17.5 83,10 79,10
GND on Top Layer "Top Layer-No Net" (solid, pour order 0): 13,57 13,49.5 20.5,49.5 20.5,57
12V on Top Layer "Top Layer-No Net" (solid, pour order 2): 20,31.5 13.996,31.5 13.996,28.5 10,28.5 10,45.25 13.25,48.5 20,48.5
GND on Top Layer "Top Layer-No Net" (solid, pour order 10): 0.5,59 1,59.5 99.5,59.5 99.5,0 0.5,0.373
GND on Bottom Layer "Top Layer-No Net" (solid, pour order 4): 0,59.5 99.5,59.5 99.5,1 99,0.5 0,0.5

## Silkscreen, mask and mechanical layers (free items; w line width, h text height)
Top Overlay:
  text "5VEX" at 95,40 h1.52 r270
  text "GND" at 4,35.5 h1.52 r90
Mechanical 1:
  lines w0.254: 0,0.5 0,60 99.5,60 100,60 100,59.5 100,0 0,0 0,1

## Text inside footprints (layer, text, board x,y; h text height)
1: Top Layer "NTB" at 11.698,13.433 h4.87; Top Layer "FHO Fachhochschule Ostschweiz" at 11.702,6.039 h1.88; Top Layer "für Technik Buchs" at 11.702,8.904 h2.25; Top Layer "Interstaatliche Hochschule" at 11.698,10.802 h2.25; Top Solder "NTB" at 11.698,13.433 h4.87; Top Solder "FHO Fachhochschule Ostschweiz" at 11.702,6.039 h1.88; Top Solder "für Technik Buchs" at 11.702,8.904 h2.25; Top Solder "Interstaatliche Hochschule" at 11.698,10.802 h2.25